# Altium PCB Convert_Board.PcbDoc
Units mil, origin at the board's own origin, x right, y up, seen from the top; angles counter-clockwise.
Board outline 2220 x 1968.5 mil, 2 copper layers (Top Layer, Bottom Layer); 18 components, 66 nets, 220 pads, 26 vias.
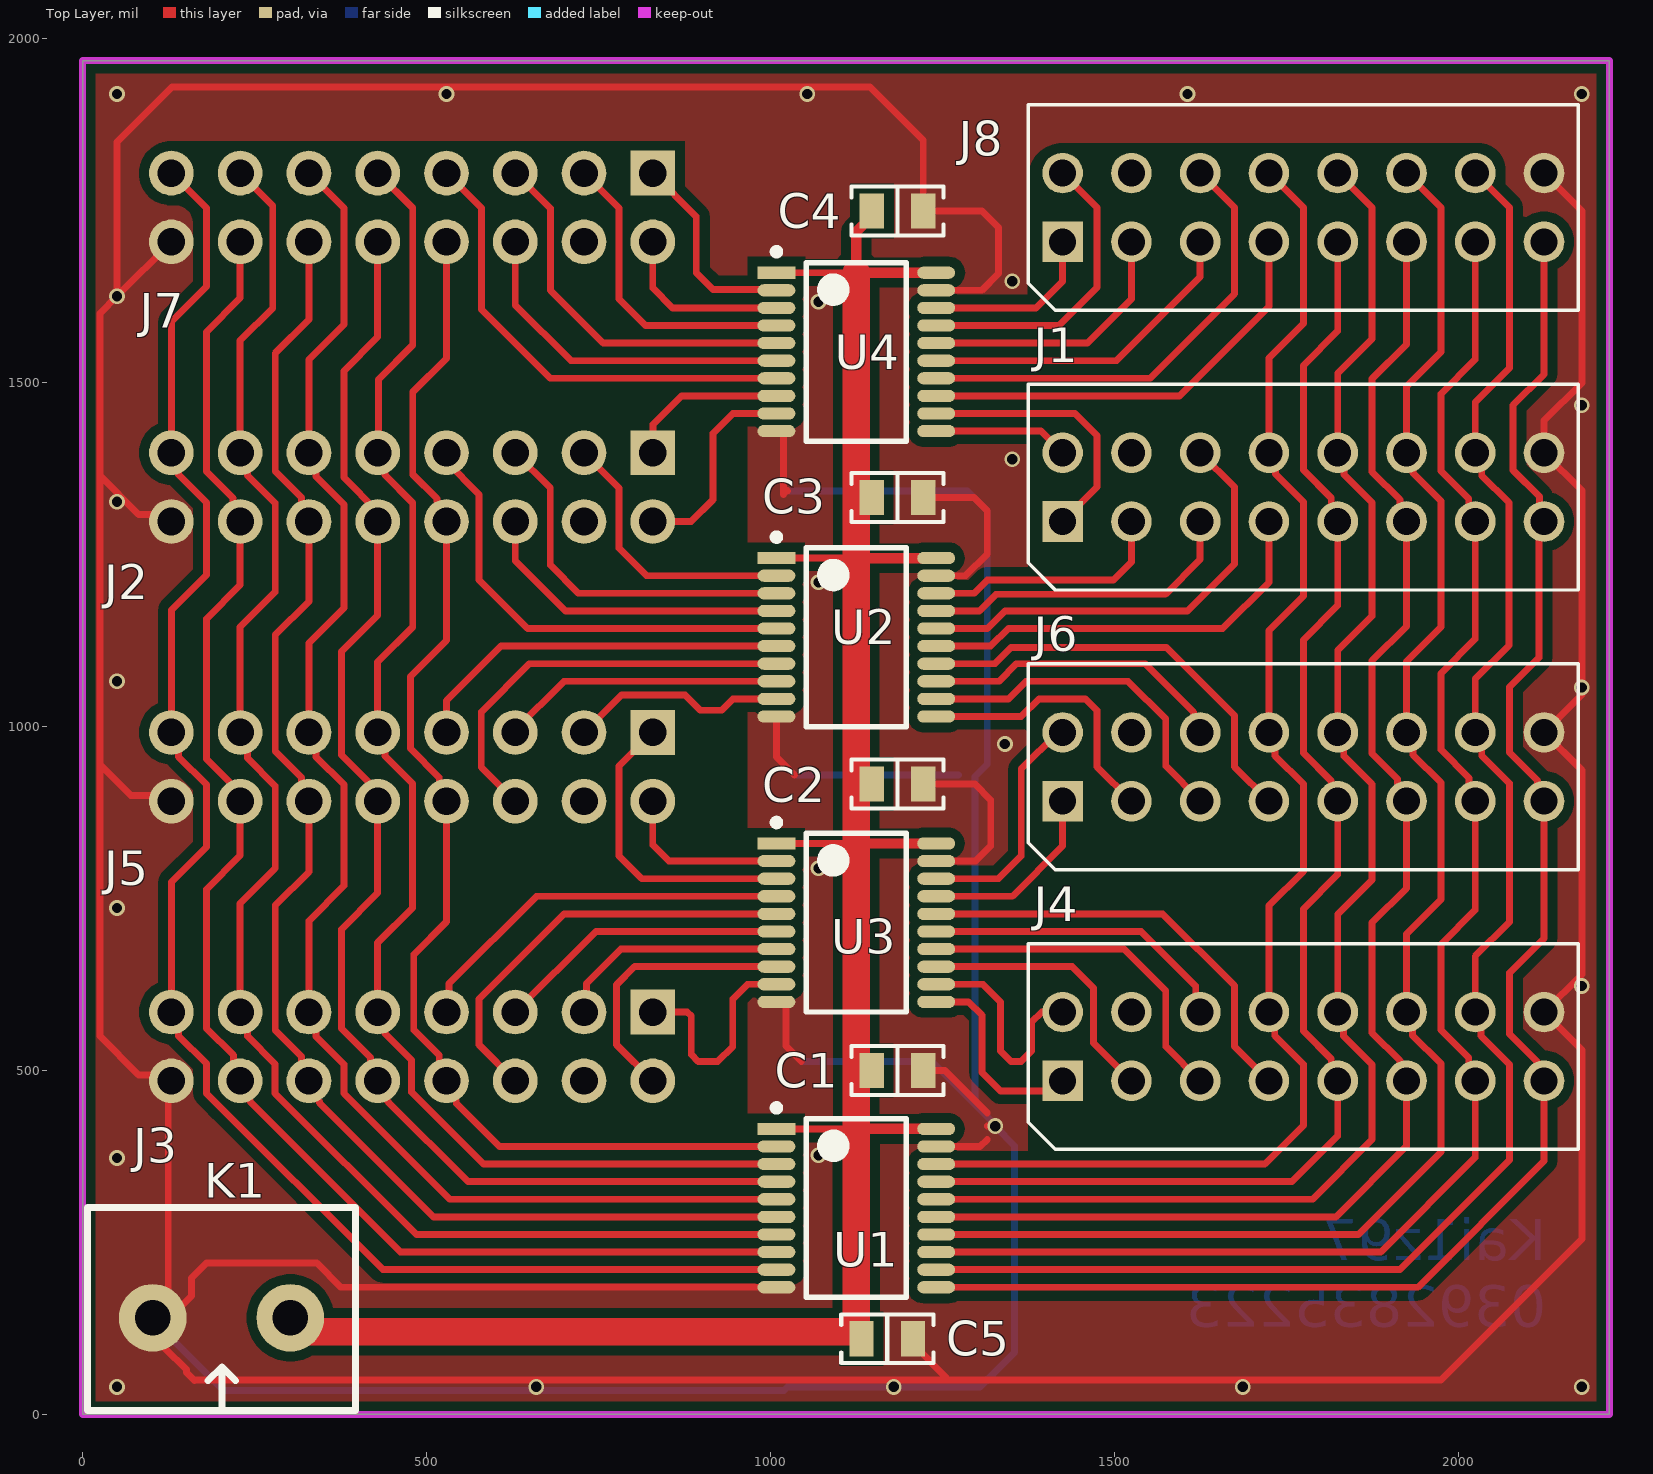
[diagram p0: Top Layer view]
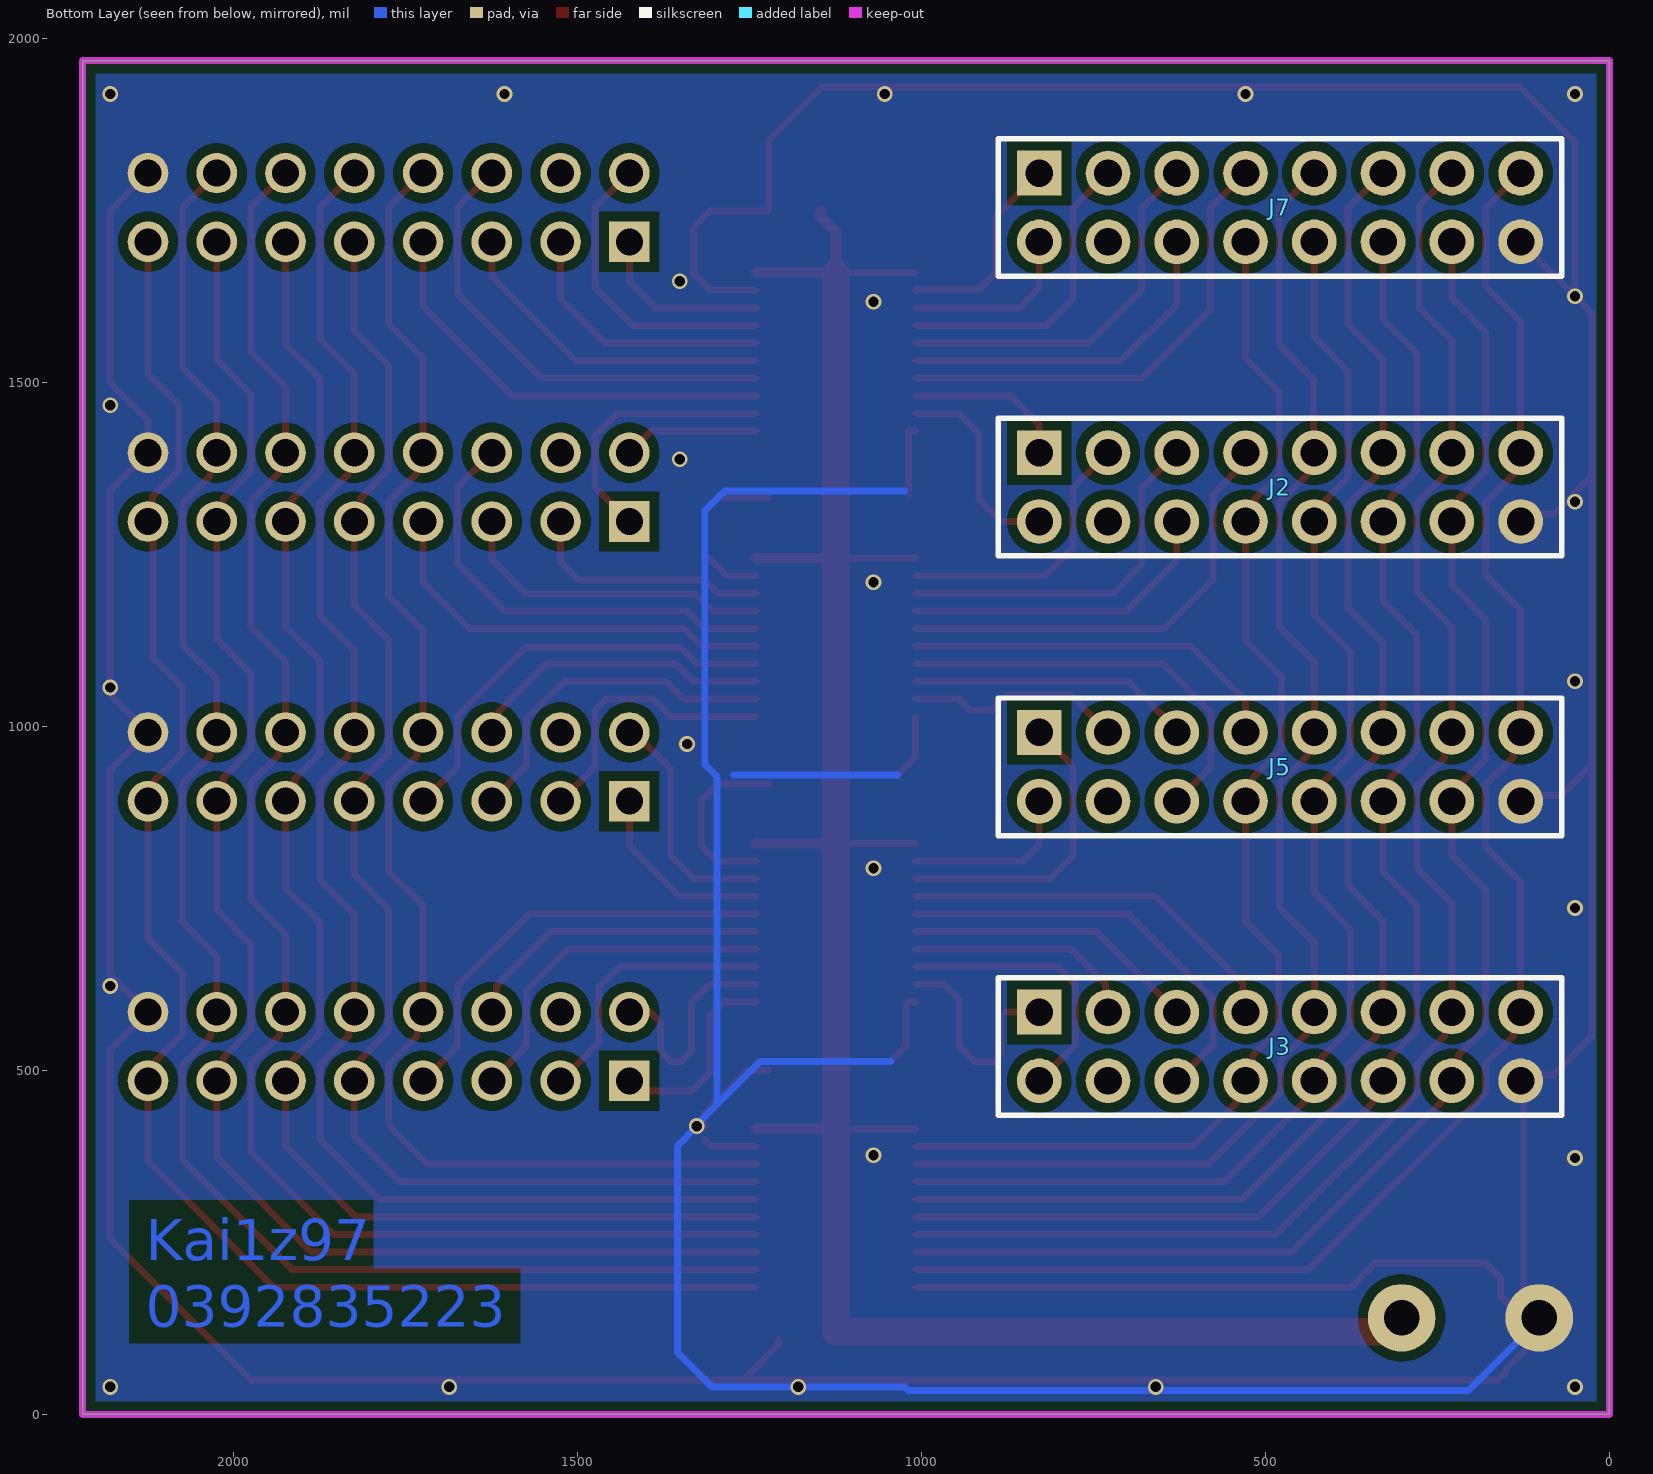
[diagram p1: Bottom Layer view, seen from below]
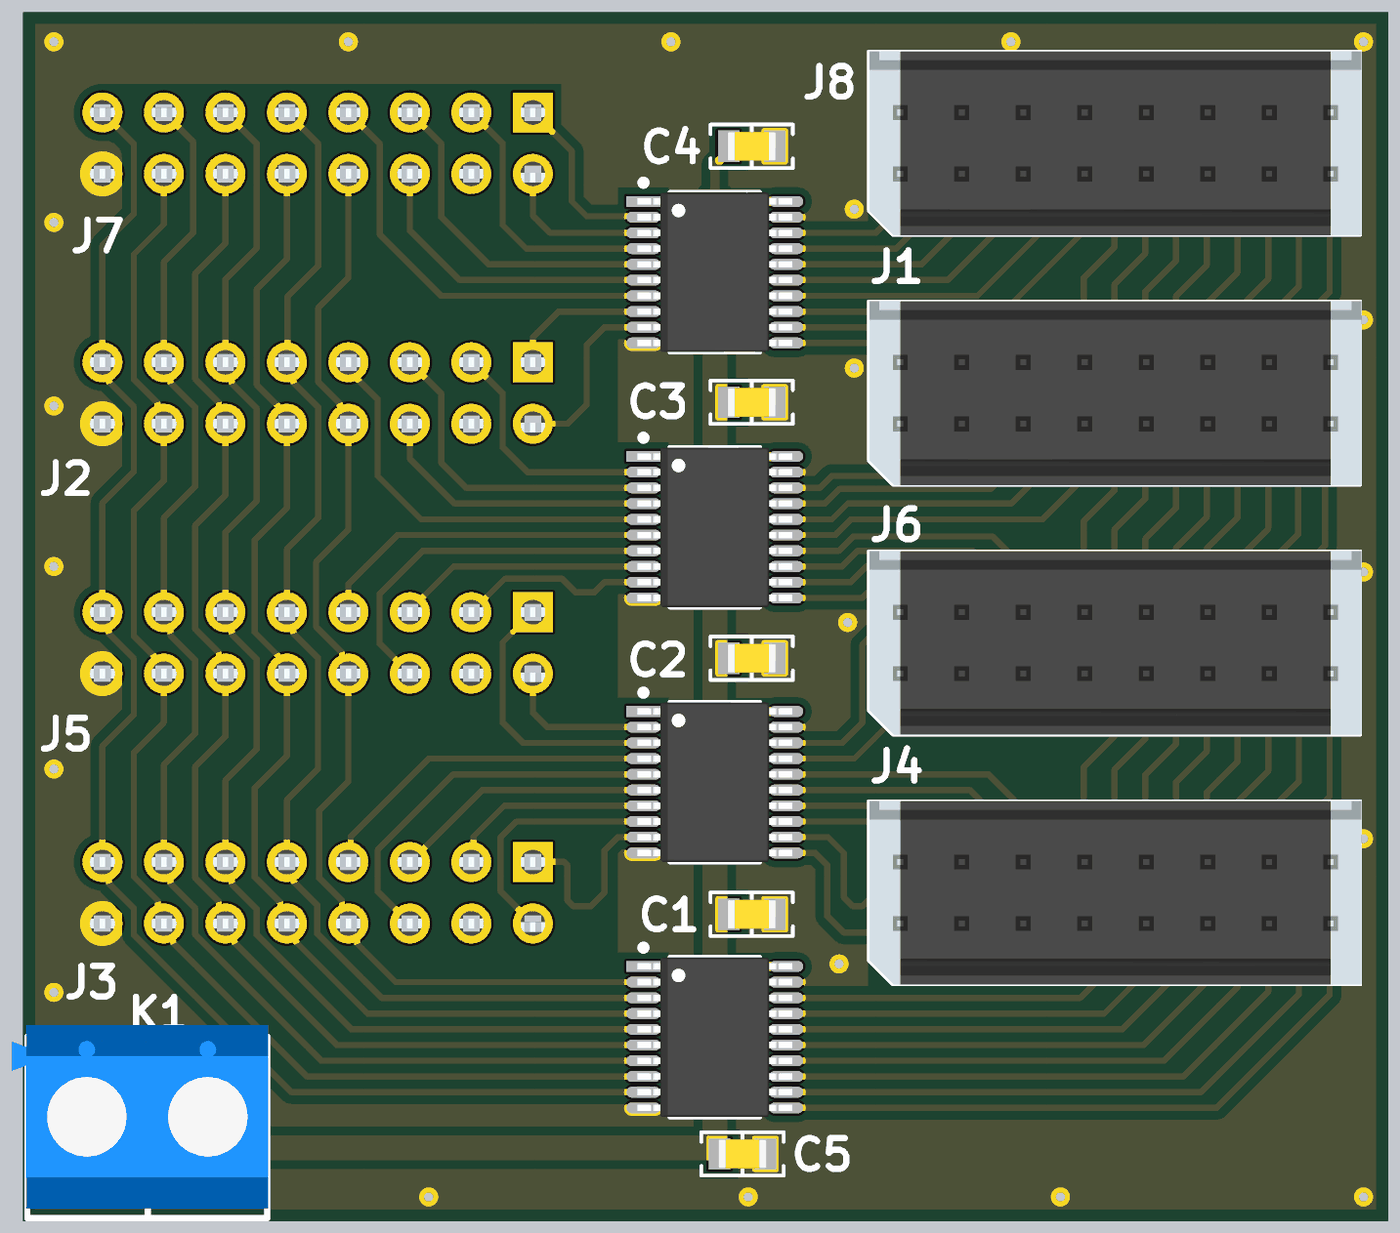
[diagram p2: 3D render of the assembled board from above, using the file's embedded part models]
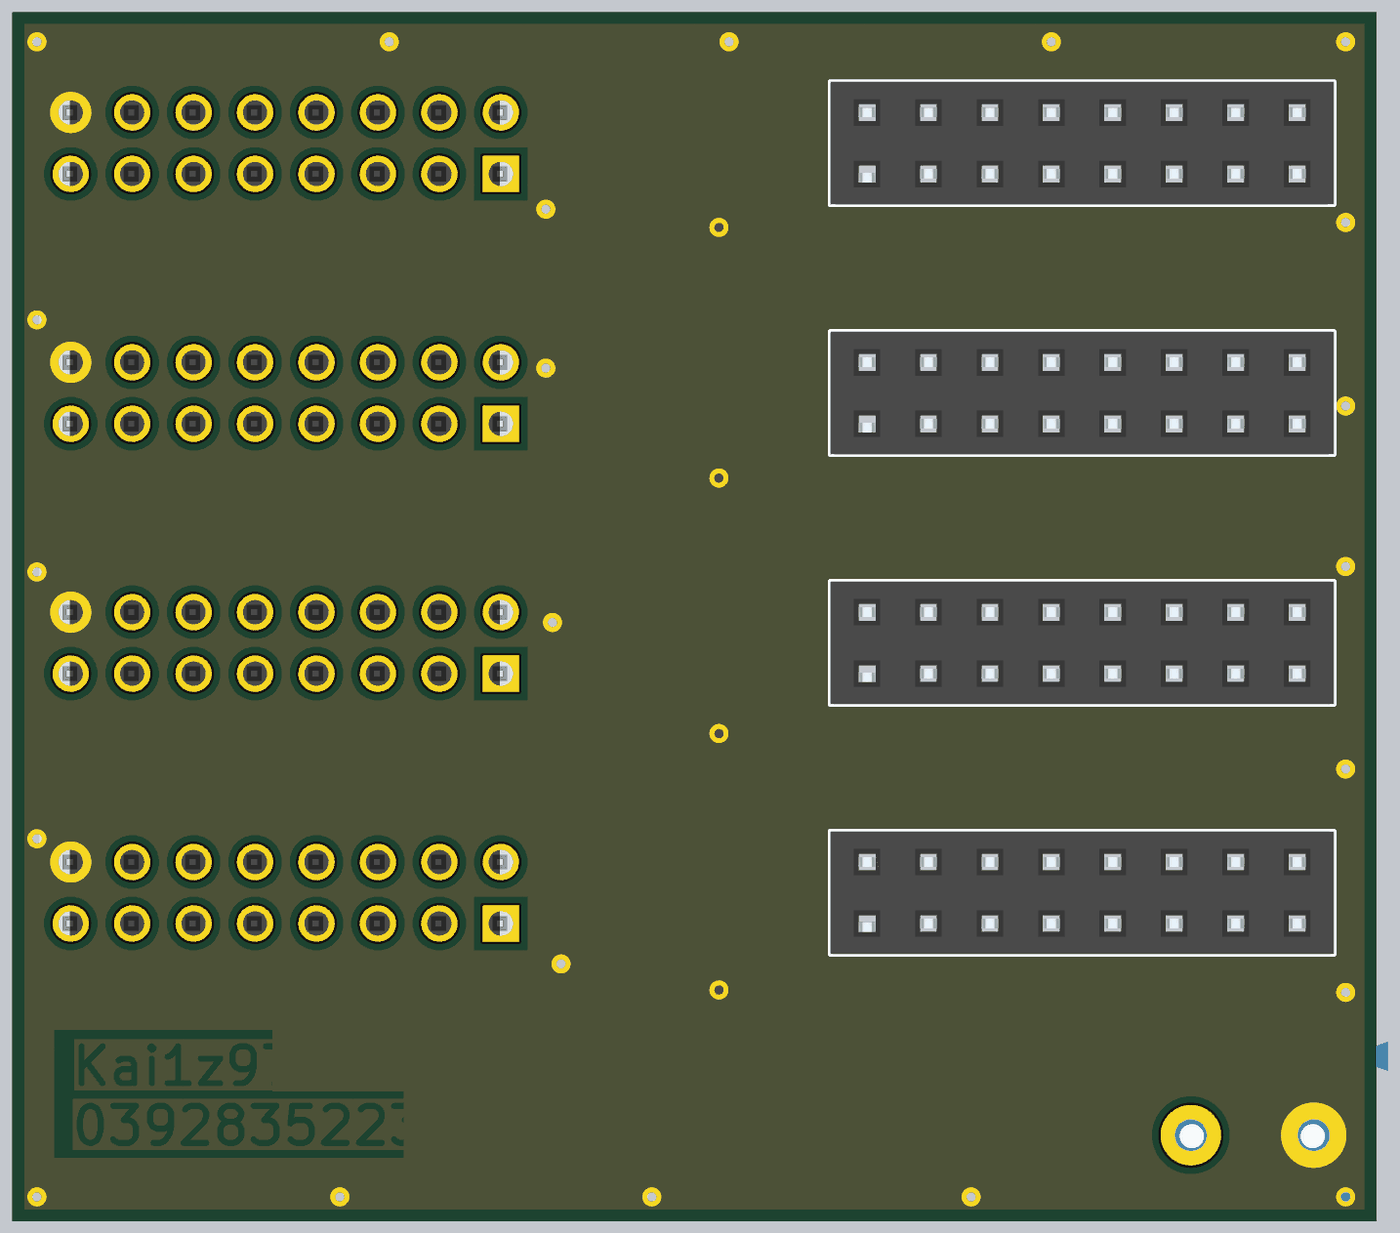
[diagram p3: 3D render of the assembled board from below, using the file's embedded part models]

## Layer stack, top to bottom
Top Solder: solder mask 0.4, Solder Resist, Dk 3.5
Top Layer: signal copper 1.4
Dielectric 1: dielectric 12.6, FR-4, Dk 4.8
Bottom Layer: signal copper 1.4
Bottom Solder: solder mask 0.4, Solder Resist, Dk 3.5

## Board outline
0,0 0,1964 0,1968.5 2220,1968.5 2220,0

## Design rules (kind name [scope] priority, off if disabled: settings)
Clearance GND [InNet('GND')] p1: gap=14 ignorepadtopadclearanceinfootprint=FALSE
Clearance [All] p2: gap=8 ignorepadtopadclearanceinfootprint=FALSE
PlaneConnect [All] p1: planeconnectstyle=Direct reliefexpansion=20 reliefentries=4 reliefconductorwidth=10 reliefairgap=10
PolygonConnect [All] p1: connectstyle=Direct reliefconductorwidth=10 reliefentries=4 polygonreliefangle="90 Angle" airgapwidth=10
RoomDefinition "[03] - Convert" [InComponentClass('[03] - Convert')] p1: confinementstyle=ConfineIn formatcopy=TRUE lockcomponents=FALSE outline 0,0 2220,0 2220,1970 0,1970
RoutingVias [All] p1: holewidth=15 width=23 viastyle="Through Hole" minholewidth=5 minwidth=15 maxholewidth=30 maxwidth=50
SolderMaskExpansion [All] p1: expansion=4 istentingtop=FALSE
Width [All] p1: maxlimit=50 minlimit=10 preferedwidth=10
29 further rules are at their usual default settings.

## Classes and differential pairs
component class "[03] - Convert": C1 C2 C3 C4 C5 J1 J2 J3 J4 J5 J6 J7 K1 U1 U2 U3 U4

## Components (designator, comment, footprint, x,y, rotation, side; value= is the part's Value field where it differs from the comment)
C1 "104" C0805 1185,500 r0 top
C2 "104" C0805 1185,916.67 r0 top
C3 "104" C0805 1185,1333.33 r0 top
C4 "104" C0805 1185,1750 r0 top
C5 "104" C0805 1170,110 r0 top
J1 "66101621622" 66101621622 1775,1348.33 r180 top
J2 "61301621821" 61301621821 479,1348.33 r180 bottom locked
J3 "61301621821" 61301621821 479,535 r180 bottom locked
J4 "66101621622" 66101621622 1775,535 r180 top
J5 "61301621821" 61301621821 479,941.67 r180 bottom locked
J6 "66101621622" 66101621622 1775,941.67 r180 top
J7 "61301621821" 61301621821 479,1755 r180 bottom locked
J8 "66101621622" 66101621622 1775,1755 r180 top
K1 "KF2" "KF5.08 2DV" 202,145.43 r180 top
U1 "SN74HC245PWR" TSSOP65P440X650-20N 1125,300 r0 top
U2 "SN74HC245PWR" TSSOP65P440X650-20N 1125,1130 r0 top
U3 "SN74HC245PWR" TSSOP65P440X650-20N 1125,715 r0 top
U4 "SN74HC245PWR" TSSOP65P440X650-20N 1125,1545 r0 top

## Footprints (in the part's own frame and the unit in brackets; to place one, negate y for a bottom-side part, rotate by r counter-clockwise, add the part's x,y. Pads: shape width x height; smd on the part's side, far side on the other; paste and mask are expansions set on the pad)
61301621821 [mil] "16 pins, dual row, straight, gold plating"
  rect 65x65 hole 40.16: 1(-350,50)
  round 65 hole 40.16: 2(-250,50) 3(-150,50) 4(-50,50) 5(50,50) 6(150,50) 7(250,50) 8(350,50) 9(-350,-50) 10(-250,-50) 11(-150,-50) 12(-50,-50) 13(50,-50) 14(150,-50) 15(250,-50) 16(350,-50)
  silkscreen extent -410,-100 410,100, body extent -410,-100 410,100, height 333
66101621622 [mm] "16 pins"
  rect 1.5x1.5 hole 1: 1(8.89,1.27)
  round 1.5 hole 1: 2(6.35,1.27) 3(3.81,1.27) 4(1.27,1.27) 5(-1.27,1.27) 6(-3.81,1.27) 7(-6.35,1.27) 8(-8.89,1.27) 9(-8.89,-1.27) 10(-6.35,-1.27) 11(-3.81,-1.27) 12(-1.27,-1.27) 13(1.27,-1.27) 14(3.81,-1.27) 15(6.35,-1.27) 16(8.89,-1.27)
  silkscreen extent -10.16,-3.8 10.16,3.8, body extent -10.2,-3.8 10.12,3.8, height 11.3
C0805 [mm] "Chip Capacitor, 2-Leads, Body 2.00x1.20mm, IPC Medium Density"
  rect 0.9x1.3 smd: 1(-0.95,0) 2(0.95,0)
  silkscreen extent -1.7,-0.9 1.7,0.9, body extent -1,-0.6 1,0.6, height 0.95
"KF5.08 2DV" [mm]
  round 2.5 hole 1.3: 1(-2.54,0.127) 2(2.54,0.127)
  silkscreen extent -4.95,-3.95 4.95,3.56, body extent -5,-4.44 5.6,3.17, height 10.13
TSSOP65P440X650-20N [mm] "TSSOP, 20-Leads, Body 6.50x4.40mm, Pitch 0.65mm, IPC Medium Density"
  rect 1.4x0.45 smd: 1(-2.95,2.925)
  oval 1.4x0.45 smd: 2(-2.95,2.275) 3(-2.95,1.625) 4(-2.95,0.975) 5(-2.95,0.325) 6(-2.95,-0.325) 7(-2.95,-0.975) 8(-2.95,-1.625) 9(-2.95,-2.275) 10(-2.95,-2.925) 11(2.95,-2.925) 12(2.95,-2.275) 13(2.95,-1.625) 14(2.95,-0.975) 15(2.95,-0.325) 16(2.95,0.325) 17(2.95,0.975) 18(2.95,1.625) 19(2.95,2.275) 20(2.95,2.925)
  silkscreen extent -3.07,-3.3 1.85,3.82, body extent -3.2,-3.3 3.2,3.3, height 0.95

## Part data
C1 C2 C3 C4 C5: library part CAP-SMD-CERAMIC, "Surface Mound Multilayer Ceramic Chip Capacitor (SMD MLCC)", Capacitance=22pF, Manufacturer="TDK Corporation", Manufacturer Part Number=C2012X5R1C226K, Operating Temperature="-55°C ~ 85°C", Package / Case="0805 (2012 Metric)", Ratings=-, Temperature Coefficient=X5R, Tolerance=±10%, Voltage - Rated=16V, .Checked PCB=RF, .Checked SCH=RF, Applications="General Purpose", Category=Capacitors, ComponentLink1Description=http://www.tdk.com/pdf/general_B11.pdf, ComponentLink1URL=http://www.tdk.com/pdf/general_B11.pdf, Features=-, Height - Seated (Max)=-, Lead Spacing=-, Lead Style=-, Mounting Type="Surface Mount, MLCC", Packaging="Cut Tape (CT)", RoHS="RoHS Compliant", Size / Dimension="0.079\" L x 0.049\" W (2.00mm x 1.25mm)", Thickness (Max)="0.057\" (1.45mm)"
J1 J4 J6 J8: library part "LHeader 16 Dual 2.54MM", Manufacturer="Wurth Elektronik", ComponentLink1 Description=Manufacturer, ComponentLink1URL=http://www.we-online.com, ComponentLink2 Description=Datasheet, ComponentLink2URL=http://katalog.we-online.de/em/datasheet/6610XX11622.pdf, Created by="Baojun Chen", Created Date="March 2016", NoPins=16, partNo=66101621622
J2 J3 J5 J7: library part "JP8 2.54MM Dual Socket", "2.54 mm Dual Socket Header, 16p", ComponentLink1Description=Manufacturer, ComponentLink1URL=http://www.we-online.de, ComponentLink2Description=Datasheet, ComponentLink2URL=http://katalog.we-online.de/em/datasheet/6130xx21821.pdf, PartNumber=61301621821, PinNumber=16p, PublishedDate="July 2016", Publisher="Wurth Elektronik"
K1: "KF2, 5.08mm, 10A, 300V, -40C ~ 105C"
U1 U2 U3 U4: "IC Bus Transceiver 8 Bit 20TSSOP / Bus Xcvr Single 8-CH 3-ST 20-PIN TSSOP T/r", Case/Package=TSSOP, High Level Output Current=7.8mA, Manufacturer="Texas Instruments", Max Operating Temperature=85°C, Max Supply Voltage=6V, Min Operating Temperature=-40°C, Min Supply Voltage=2V, Operating Supply Voltage=5V, Package Quantity=2000, Quiescent Current=8uA, Category="Buffers, Drivers and Transceivers", ComponentLink1Description=https://datasheet.ciiva.com/15086/getdatasheetpartid-246702-15086434.pdf?src-supplier=Verical, ComponentLink1URL=https://datasheet.ciiva.com/15086/getdatasheetpartid-246702-15086434.pdf?src-supplier=Verical, ComponentLink2Description=https://datasheet.ciiva.com/41456/001016711-da-01-en-ic-bus-8bit-sn-sn74hc245pwr-tssop-20-tid-41456859.pdf?src-supplier=Conrad, ComponentLink2URL=https://datasheet.ciiva.com/41456/001016711-da-01-en-ic-bus-8bit-sn-sn74hc245pwr-tssop-20-tid-41456859.pdf?src-supplier=Conrad, ComponentLink3Description=https://datasheet.ciiva.com/46442/1836514-46442662.pdf?src-supplier=Element14, ComponentLink3URL=https://datasheet.ciiva.com/46442/1836514-46442662.pdf?src-supplier=Element14, ComponentLink4Description=https://datasheet.ciiva.com/14300/scls131d-14300551.pdf?src-supplier=Avnet, ComponentLink4URL=https://datasheet.ciiva.com/14300/scls131d-14300551.pdf?src-supplier=Avnet, ComponentLink5Description=https://datasheet.ciiva.com/46442/1836514-46442663.pdf?src-supplier=Element14, ComponentLink5URL=https://datasheet.ciiva.com/46442/1836514-46442663.pdf?src-supplier=Element14, ComponentLink6Description=https://datasheet.ciiva.com/1833/sn74hc245-1833928.pdf?src-supplier=Digi-Key, ComponentLink6URL=https://datasheet.ciiva.com/1833/sn74hc245-1833928.pdf?src-supplier=Digi-Key, ComponentLink7Description=https://datasheet.ciiva.com/1833/sn74hc245-1833929.pdf?src-supplier=Digi-Key, ComponentLink7URL=https://datasheet.ciiva.com/1833/sn74hc245-1833929.pdf?src-supplier=Digi-Key, ComponentLink8Description=https://datasheet.ciiva.com/1833/sn74hc245-1833930.pdf?src-supplier=Digi-Key, ComponentLink8URL=https://datasheet.ciiva.com/1833/sn74hc245-1833930.pdf?src-supplier=Digi-Key, Contact Plating=Tin,Matte, Direction=Bidirectional, Lead Free="Lead Free", Logic Function=Transceiver,Inverting, Low Level Output Current=7.8mA, Manufacturer Part Number=SN74HC245PWR, Mount="Surface Mount", Number of Bits=8, Number of Bits per Element=8, Number of Channels=8, Number of Circuits=8, Number of Elements=1, Number of Outputs=8, Number of Pins=20, Output Type=3-STATE, Packaging="Tape and Reel", Polarity=Non-Inverting, Pricing 1="1=0.58000, 10=0.50100, 25=0.46760, 100=0.37400, 250=0.34724, 500=0.29384, 1000=0.22705 (USD)", Propagation Delay=22ns, Radiation Hardening=No, REACH SVHC="No SVHC", RoHS=Yes, RoHS Compliant=Yes, Series=74HC, Stock 1=1091, Technology=CMOS, Turn-On Delay Time=335ns, Weight=0.002716oz

## Via types
v1: diameter 23, hole 15, Top Layer to Bottom Layer, 26 vias

## Nets (pads, with @x,y where several pads share a name; then routed paths per layer and width w, separated by ;. In a path a pad name is that pad's centre, name@x,y a point inside that pad or via, vN(x,y) a via of type N, cw(c..) or ccw(c..) an arc to the next point about the centre after c; other vN are vias at no path point)
B1_IN: J2.2 U2.2 | length 405.3
  Top Layer w10: J2.2 780,1347.33 780,1259.54 819.97,1219.57 U2.2
B1_OUT: J1.2 U2.18 | length 361.5
  Top Layer w10: U2.18 1295.89,1193.98 1315.41,1213.5 1498.86,1213.5 1525,1239.64 J1.2
B2_IN: J2.4 U2.5 | length 666.2
  Top Layer w10: J2.4 529,1385.29 576.5,1337.79 576.5,1213.5 647.2,1142.8 U2.5
B2_OUT: J1.4 U2.15 | length 610.6
  Top Layer w10: U2.15 1320.45,1117.2 1346.04,1142.8 1657.8,1142.8 1725,1210 J1.4
B3_IN: J3.2 U3.7 | length 340.1
  Top Layer w10: J3.2 732.57,588.57 732.57,626.64 782.54,676.61 U3.7
B3_OUT: J4.2 U3.13 | length 399.5
  Top Layer w10: U3.13 1438.98,651.02 1470,620 1470,540 J4.2
B4_IN: J3.4 U3.4 | length 571.7
  Top Layer w10: J3.4 532.88,588.88 532.88,626.64 659.62,753.39 U3.4
B4_OUT: J4.4 U3.16 | length 636.2
  Top Layer w10: U3.16 1570.52,727.8 1675,623.32 1675,535 J4.4
B5_IN: J5.2 U2.9 | length 318.4
  Top Layer w10: J5.2 783.36,1046.02 876.18,1046.02 898.36,1023.84 928.76,1023.84 945.35,1040.43 U2.9
B5_OUT: J6.2 U2.11 | length 404.2
  Top Layer w10: U2.11 1364.8,1014.84 1390.39,1040.43 1458.41,1040.43 1475,1023.84 1475,941.67 J6.2
B6_IN: J5.4 U2.6 | length 558.9
  Top Layer w10: J5.4 529,1037.77 608.44,1117.2 U2.6
B6_OUT: J6.4 U2.14 | length 629.6
  Top Layer w10: U2.14 1326.61,1091.61 1350,1115 1576.02,1115 1675,1016.02 1675,941.67 J6.4
B7_IN: J7.2 U4.4 | length 449.1
  Top Layer w10: J7.2 780,1754 780,1621.77 818.38,1583.39 U4.4
B7_OUT: J8.2 U4.16 | length 393.7
  Top Layer w10: U4.16 1461.08,1557.8 1525.05,1621.77 1525.05,1704.95 J8.2
B8_IN: J7.4 U4.7 | length 689.7
  Top Layer w10: J7.4 580,1754 580,1606.8 680.18,1506.61 U4.7
B8_OUT: J8.4 U4.13 | length 631.6
  Top Layer w10: U4.13 1594.93,1481.02 1725,1611.1 J8.4
CLK_IN: J2.7 J3.7 J5.7 J7.7 U1.7 | length 2297
  Top Layer w10: J7.7 276.5,1757.5 276.5,1608.88 229,1561.38 J2.7 239.52,1387.81 239.52,1365.48 280,1325 280,1195.96 229,1144.96 J5.7 239.52,981.14 239.52,954.49 280,914.01 280,794.14 229,743.14 J3.7 239.52,574.48 239.52,549.94 279.88,509.58 279.88,466.94 485.21,261.61 U1.7
CLK_OUT: J1.7 J4.7 J6.7 J8.7 U1.13 | length 2296.6
  Top Layer w10: U1.13 1887.64,236.02 2025,373.39 J4.7 2015.61,494.39 2015.61,518.57 1975,559.18 1975,683.19 2025,733.19 J6.7 2015.94,900.73 2015.94,925.58 1975,966.51 1975,1077.62 2025,1127.62 J1.7 2015.61,1307.72 2015.61,1331.32 1975,1371.94 1975,1484.06 2025,1534.06 J8.7
G1_IN: J2.9 U4.9 | length 301.6
  Top Layer w10: J2.9 884.95,1298.33 916.61,1330 916.61,1426.69 945.35,1455.43 U4.9
G1_OUT: J1.16 U4.11 | length 196.9
  Top Layer w10: U4.11 1393.49,1429.84 J1.16
G2_IN: J2.11 U2.4 | length 466.9
  Top Layer w10: J2.11 629,1241.7 702.32,1168.39 U2.4
G2_OUT: J1.14 U2.16 | length 655.1
  Top Layer w10: U2.16 1315.41,1142.8 1341,1168.39 1606.61,1168.39 1675,1236.77 1675,1348.33 J1.14
G3_IN: J3.9 U3.8 | length 404.7
  Top Layer w10: J3.9 776.5,537.5 776.5,624.76 802.77,651.02 U3.8
G3_OUT: J4.16 U3.12 | length 326.7
  Top Layer w10: U3.12 1309.08,625.43 1334.68,599.84 1334.68,528.28 1349.88,513.08 1364.8,513.08 1380,528.28 1380,570.32 1394.68,585 J4.16
G4_IN: J3.11 U3.5 | length 624.5
  Top Layer w10: J3.11 576.5,537.5 576.5,604.22 700.08,727.8 U3.5
G4_OUT: J4.14 U3.15 | length 450.8
  Top Layer w10: U3.15 1539.27,702.2 1618.51,622.96 1618.51,591.49 J4.14
G5_IN: J5.9 U3.2 | length 253.3
  Top Layer w10: J5.9 829,827.9 852.33,804.57 U3.2
G5_OUT: J6.16 U3.18 | length 346
  Top Layer w10: U3.18 1331.87,778.98 1364.8,811.9 1364.8,938.29 1418.17,991.67 J6.16
G6_IN: J5.11 U2.7 | length 608.4
  Top Layer w10: J5.11 579.67,940.99 579.67,1021.26 650.02,1091.61 U2.7
G6_OUT: J6.14 U2.13 | length 447.6
  Top Layer w10: U2.13 1332.24,1066.02 1357.83,1091.61 1545.05,1091.61 1615.61,1021.05 1615.61,1001.05 J6.14
G7_IN: J7.9 U4.3 | length 259
  Top Layer w10: J7.9 829,1637.77 857.79,1608.98 U4.3
G7_OUT: J8.16 U4.17 | length 443.8
  Top Layer w10: U4.17 1419.8,1583.39 1475,1638.58 1475,1755 J8.16
G8_IN: J7.11 U4.6 | length 505.1
  Top Layer w10: J7.11 629,1613.39 710.18,1532.2 U4.6
G8_OUT: J8.14 U4.14 | length 681
  Top Layer w10: U4.14 1552.11,1506.61 1675,1629.5 1675,1755 J8.14
GND: C1.2 C2.2 C3.2 C4.2 C5.2 J1.9 J2.16 J3.16 J4.9 J5.16 J6.9 J7.16 J8.9 K1.2 U1.10 U1.19 U2.10 U2.19 U3.10 U3.19 U4.10 U4.19 | length 13132.9
  Top Layer w10: K1.2 106.5,144.93 K1.2@106.5,158.82 ; K1.2@120,120 120,96.07 151.06,65.01 151.06,60.68 162.6,49.14 163.46,50 1255,50 ; J5.16 120.67,900 70,900 25,945 ; J2.16 118.83,1308.5 81.5,1308.5 25,1365 ; J7.16 v1(50,1626) ; U1.10 375.59,184.84 340.43,220 180,220 158.46,198.46 158.46,172.35 124.5,138.39 124.5,480.5 J3.16 120.5,493.5 81.5,493.5 25,550 25,945 ; U3.10 1018.99,599.84 1022.56,596.28 1022.56,535.52 1045,513.08 ; U2.10 1008.86,955.98 1035,929.84 ; U4.10 1018.99,1429.84 1018.99,1337.79 ; 1024.53,1343.33 1025,1342.86 ; C5.2 1207.4,102.13 1255,54.53 1255,50 ; C1.2 1253.7,500 1315.41,438.29 ; C2.2 1297.36,916.67 1320.45,893.58 1320.45,826.58 1298.44,804.57 U3.19 ; C3.2 1295.89,1333.33 1315.41,1313.81 1315.41,1251.25 1283.73,1219.57 U2.19 ; U1.19 1304.98,389.57 1315.41,400 ; U4.19 1307.4,1634.57 1331.87,1659.04 1331.87,1725.92 1307.8,1750 C4.2 1222.4,1852.6 1145,1930 130,1930 50,1850 v1(50,1626) ; 1315.41,419.14 v1(1327.05,419.14) v1@1327.91,420 ; J8.9 2180,1750 2180,1500 2125,1445 J1.9 2180,1343.33 2180,1046.67 J6.9 2180,936.67 2180,640 J4.9 2180,530 2180,255 1975,50 1255,50 ; 25,945 25,1365 ; 25,1365 25,1601 v1(50,1626)
  Bottom Layer w10: K1.2@120,120 205,35 1020,35 1025,40 1305,40 1355,90 1355,390.52 1327.91,417.61 1327.91,420 1297.36,450.55 ; 1025,1342.86 1286.36,1342.86 1315.41,1313.81 1315.41,945.54 1297.36,927.49 1297.36,916.67 1297.36,450.55 ; 1035,929.84 1273.36,929.84 ; 1045,513.08 1234.83,513.08 1297.36,450.55
  other v1: 50,40 659.62,40 1179.32,40 1687.03,40 2180,40 50,372.9 1070,376.77 2180,622.96 50,736.38 1070,794.14 1341,974.95 2180,1057.1 50,1066.02 1070,1210 50,1327.22 1351.81,1388.95 2180,1467.46 1070,1617.9 1351.81,1647.61 50,1920 529,1920 1053.55,1920 1606.61,1920 2180,1920
LA_IN: J2.5 J3.5 J5.5 J7.5 U1.3 | length 2057.1
  Top Layer w10: J7.5 480,1754 480,1555 430,1505 430,1399.33 J2.5 439.52,1387.81 439.52,1365.99 480,1325.52 480,1145 429,1094 J5.5 439.52,981.14 439.52,957.48 479.55,917.46 479.55,736.38 429,685.83 J3.5 439.52,574.48 439.52,553.93 478.37,515.09 478.37,468.46 582.85,363.98 U1.3
LA_OUT: J1.5 J4.5 J6.5 J8.5 U1.17 | length 2035.7
  Top Layer w10: U1.17 1758.3,338.39 1825,405.09 J4.5 1815.61,494.39 1815.61,516.84 1775,557.45 1775,735 1825,785 J6.5 1815.61,901.05 1815.61,921.06 1775,961.67 1775,1125.88 1825,1175.88 J1.5 1815.61,1307.72 1815.61,1332.65 1775,1373.27 1775,1525.32 1825,1575.32 J8.5
LAT_IN: J2.15 J3.15 J5.15 J7.15 U1.8 | length 2220.2
  Top Layer w10: J3.15@219.09,494.91 219.09,522.26 180,561.35 180,763.6 229,812.6 229,904.28 180,953.28 180,1156.93 229,1205.93 J2.15 218.48,1308.86 218.48,1332.51 180,1370.99 180,1574.11 229,1623.11 J7.15 ; J3.15 229,470.12 244.52,454.6 244.52,453.34 461.84,236.02 U1.8
LAT_OUT: J1.10 J4.10 J6.10 J8.10 U1.12 | length 2478.9
  Top Layer w10: U1.12 1915.43,210.43 2075,370 2075,508.99 2033.48,550.51 2033.48,576.52 J4.10 2025,666.23 2075,716.23 2075,917.74 2034.39,958.35 2034.39,982.28 J6.10 2025,1069.58 2073.81,1118.4 2073.81,1325.71 2034.39,1365.14 2034.39,1388.95 J1.10 2025,1471.42 2075,1521.42 2075,1755 J8.10
LB_IN: J2.13 J3.13 J5.13 J7.13 U1.4 | length 1982.3
  Top Layer w10: J3.13@418.48,495.52 418.48,518.91 376.5,560.89 376.5,705.41 429,757.91 429,906.55 376.5,959.05 376.5,1109.3 429,1161.8 429,1313.22 380,1362.22 380,1517.49 429,1566.49 J7.13 ; J3.13 429,470.12 444.92,454.2 444.92,453.74 560.27,338.39 U1.4
LB_OUT: J1.12 J4.12 J6.12 J8.12 U1.16 | length 2220.2
  Top Layer w10: U1.16 1788.15,312.8 1875,399.64 1875,508.68 1833.33,550.36 1833.33,576.67 J4.12 1825,727.02 1875,777.02 1875,916.32 1833.81,957.51 1833.81,982.85 J6.12 1825,1110.64 1875,1160.64 1875,1326.24 1834.39,1366.86 1834.39,1388.95 J1.12 1825,1513.82 1875,1563.82 1875,1755 J8.12
LC_IN: J2.6 J3.6 J5.6 J7.6 U1.5 | length 2180.5
  Top Layer w10: J3.6@329,583.22 329,717.76 380,768.76 380,915.69 339.52,956.16 339.52,981.14 J5.6 329,1121.8 380,1172.8 380,1323.12 339.52,1363.6 339.52,1387.81 J2.6 329,1533.77 380,1584.77 380,1754 J7.6 ; J3.6 339.52,574.48 339.52,549.45 379.88,509.09 379.88,466.95 534.03,312.8 U1.5
LC_OUT: J1.6 J4.6 J6.6 J8.6 U1.15 | length 2165.7
  Top Layer w10: U1.15 1822.2,287.2 1925,390 J4.6 1915.61,494.39 1915.61,514.32 1875,554.94 1875,715.05 1925,765.05 1925,904.94 1912.03,917.91 1912.03,923.9 1875,960.93 1875,1095.95 1925,1145.95 J1.6 1915.61,1307.72 1915.61,1330.04 1875,1370.65 1875,1505.95 1925,1555.95 J8.6
LD_IN: J2.14 J3.14 J5.14 J7.14 U1.6 | length 2113.3
  Top Layer w10: J7.14 329,1592.03 280,1543.03 280,1371.54 318.48,1333.07 318.48,1308.86 J2.14 329,1182.17 280,1133.17 280,964.67 318.48,926.19 318.48,902.19 J5.14 329,789 280,740 280,559.13 318.48,520.66 318.48,495.52 J3.14 329,470.12 344.26,454.86 344.26,453.08 510.14,287.2 U1.6
LD_OUT: J1.11 J4.11 J6.11 J8.11 U1.14 | length 2352
  Top Layer w10: U1.14 1855.16,261.61 1975,381.45 1975,510.08 1934.03,551.06 1934.03,575.97 J4.11 1925,698.5 1975,748.5 1975,918.56 1934.39,959.17 1934.39,982.28 J6.11 1925,1095 1975,1145 1975,1328.31 1934.39,1368.92 1934.39,1388.95 J1.11 1925,1494.8 1975,1544.8 1975,1755 J8.11
LE_IN: J2.12 J3.12 J5.12 J7.12 U1.2 | length 1859
  Top Layer w10: J3.12@518.61,495.39 518.61,521.78 481.5,558.88 481.5,668.87 529,716.37 J5.12 518.48,902.19 518.48,926.47 476.5,968.45 476.5,1073.11 529,1125.61 529,1313.22 514.99,1327.22 514.99,1331.5 480,1366.5 480,1486.61 529,1535.61 J7.12 ; J3.12 529,470.12 543.34,455.78 543.34,452.17 605.94,389.57 U1.2
LE_OUT: J1.13 J4.13 J6.13 J8.13 U1.18 | length 2087
  Top Layer w10: U1.18 1718.98,363.98 1775,420 1775,509.07 1733.52,550.55 1733.52,576.48 J4.13 1725,739.74 1775,789.74 1775,916.69 1734,957.69 1734,982.67 J6.13 1725,1140 1775,1190 1775,1326.91 1734.39,1367.52 1734.39,1388.95 J1.13 1725,1536.1 1775,1586.1 1775,1755 J8.13
OE_IN: J2.8 J3.8 J5.8 J7.8 U1.9 | length 2421.1
  Top Layer w10: J7.8 180,1754 180,1640 129,1589 J2.8 139.52,1387.81 139.52,1366.4 180,1325.92 180,1220.62 129,1169.62 J5.8 139.52,981.14 139.52,956.23 180,915.75 180,825 129,774 J3.8 139.52,574.48 139.52,550.48 180,510 180,466.83 436.39,210.43 U1.9
OE_OUT: J1.8 J4.8 J6.8 J8.8 U1.11 | length 2416.6
  Top Layer w10: U1.11 1941.46,184.84 2125,368.39 J4.8 2115.61,494.39 2115.61,512.49 2075,553.11 2075,642.19 2125,692.19 J6.8 2115.61,901.05 2115.61,921.88 2075,962.49 2075,1057.8 2117.5,1100.3 2117.5,1290.83 J1.8 2118.3,1305.04 2118.3,1334.6 2080,1372.9 2080,1467.46 2125,1512.46 J8.8
R1_IN: J2.1 U4.8 | length 238.2
  Top Layer w10: J2.1 829.32,1398.65 829.32,1439.75 870.59,1481.02 U4.8
R1_OUT: J1.1 U4.12 | length 392.8
  Top Layer w10: U4.12 1442.73,1455.43 1475,1423.16 1475,1348.33 J1.1
R2_IN: J2.3 U2.3 | length 530.3
  Top Layer w10: J2.3 680,1347.33 680,1235 721.02,1193.98 U2.3
R2_OUT: J1.3 U2.17 | length 469.9
  Top Layer w10: U2.17 1303.8,1168.39 1327.91,1192.5 1574.24,1192.5 1625,1243.26 J1.3
R3_IN: J3.1 U3.9 | length 330
  Top Layer w10: J3.1 829.32,585.32 879.14,585.32 885,579.46 885,523.17 895.09,513.08 923.43,513.08 945.35,535 945.35,604.22 966.57,625.43 U3.9
R3_OUT: J4.1 U3.11 | length 292.3
  Top Layer w10: U3.11 1288.37,599.84 1307.77,580.45 1307.77,497.23 1334.68,470.32 1410.32,470.32 J4.1
R4_IN: J3.3 U3.6 | length 428.4
  Top Layer w10: J3.3 746.21,702.2 U3.6
R4_OUT: J4.3 U3.14 | length 510.5
  Top Layer w10: U3.14 1514.11,676.61 1575,615.72 1575,535 J4.3
R5_IN: J5.1 U3.3 | length 442.6
  Top Layer w10: J5.1 780,942.67 780,811.9 812.92,778.98 U3.3
R5_OUT: J6.1 U3.17 | length 279.3
  Top Layer w10: U3.17 1351.81,753.39 1425,826.58 J6.1
R6_IN: J5.3 U2.8 | length 412.6
  Top Layer w10: J5.3 629,995.02 700,1066.02 U2.8
R6_OUT: J6.3 U2.12 | length 507.5
  Top Layer w10: U2.12 1346.22,1040.43 1371.81,1066.02 1520.36,1066.02 1575,1011.39 1575,942.67 1625,892.67 J6.3
R7_IN: J7.1 U4.2 | length 298.1
  Top Layer w10: J7.1 892.2,1741.8 892.2,1660.41 916.61,1636 1007.43,1636 U4.2
R7_OUT: J8.1 U4.18 | length 257.2
  Top Layer w10: U4.18 1386.36,1608.98 1425,1647.61 J8.1
R8_IN: J7.3 U4.5 | length 552.1
  Top Layer w10: J7.3 680.18,1753.82 680.18,1634.57 756.95,1557.8 U4.5
R8_OUT: J8.3 U4.15 | length 485.4
  Top Layer w10: U4.15 1503.29,1532.2 1625,1653.92 J8.3
VCC: C1.1 C2.1 C3.1 C4.1 C5.1 K1.1 U1.1 U1.20 U2.1 U2.20 U3.1 U3.20 U4.1 U4.20 | length 3373.5
  Top Layer w10: U1.1 1125,415.16 ; U3.1 1125,830.16 ; U2.1 1125,1245.16 ; U4.1 1124.84,1660.16
  Top Layer w15: 1124.84,1660.16 1125,1660.16 ; 1125,415.16 U1.20 ; 1125,830.16 U3.20 ; 1125,1245.16 U2.20 ; 1125,1660 1125,1660.16 ; C4.1 1147.6,1742.13 1125,1719.53 1125,1660.16 ; U4.20 1125,1660.16
  Top Layer w40: K1.1@320,120 1125,120 1125,415.16 1125,830.16 1125,1245.16 1125,1660
pads on no net: J1.15 J2.10 J3.10 J4.15 J5.10 J6.15 J7.10 J8.15

## Polygon pours and split planes (outlines as drawn)
GND on Bottom Layer "GND_L02_P002" (solid, remove dead copper, pour order 2): 0,0 0,1970 2220,1970 2220,0
GND on Top Layer "GND_L01_P001" (solid, remove dead copper, pour order 1): 0,1970 0,0 2220,0 2220,1970

## Keep-outs
Keep-Out Layer:
  the board outline again, w10

## Other copper
Top Layer:
  pour cut-out: 129.58,1851.5 ccw(c129.58,1804.02) 82.1,1804.02 ccw(c127.62,1804.02) 127.62,1758.5 135.12,1758.5 cw(c135.12,1732.99) 160.63,1732.99 160.63,500 ccw(c260.63,500) 260.63,400 967.3,400 967.3,1629.5 875.5,1629.5 875.5,1851.5
  pour cut-out: 1375,1775 1375,1798.64 cw(c1424.75,1798.64) 1424.75,1848.39 2030.31,1848.39 cw(c2030.31,1809.86) 2068.84,1809.86 2068.84,450.29 cw(c2000,450.29) 2000,381.45 1374.07,381.45 1374.07,1698.37 1374.3,1698.37
Bottom Layer:
  text "Kai1z97" at 2128.23,224.5 h60
  text "0392835223" at 2128.23,127.5 h60